# Altium PCB Control.PcbDoc
Units mm, origin at the board's own origin, x right, y up, seen from the top; angles counter-clockwise.
Board outline 131.06 x 43.05 mm, 2 copper layers (Top Layer, Bottom Layer); 28 components, 84 nets, 143 pads, 14 vias.
Unrouted connection lines stored in the file: 3.
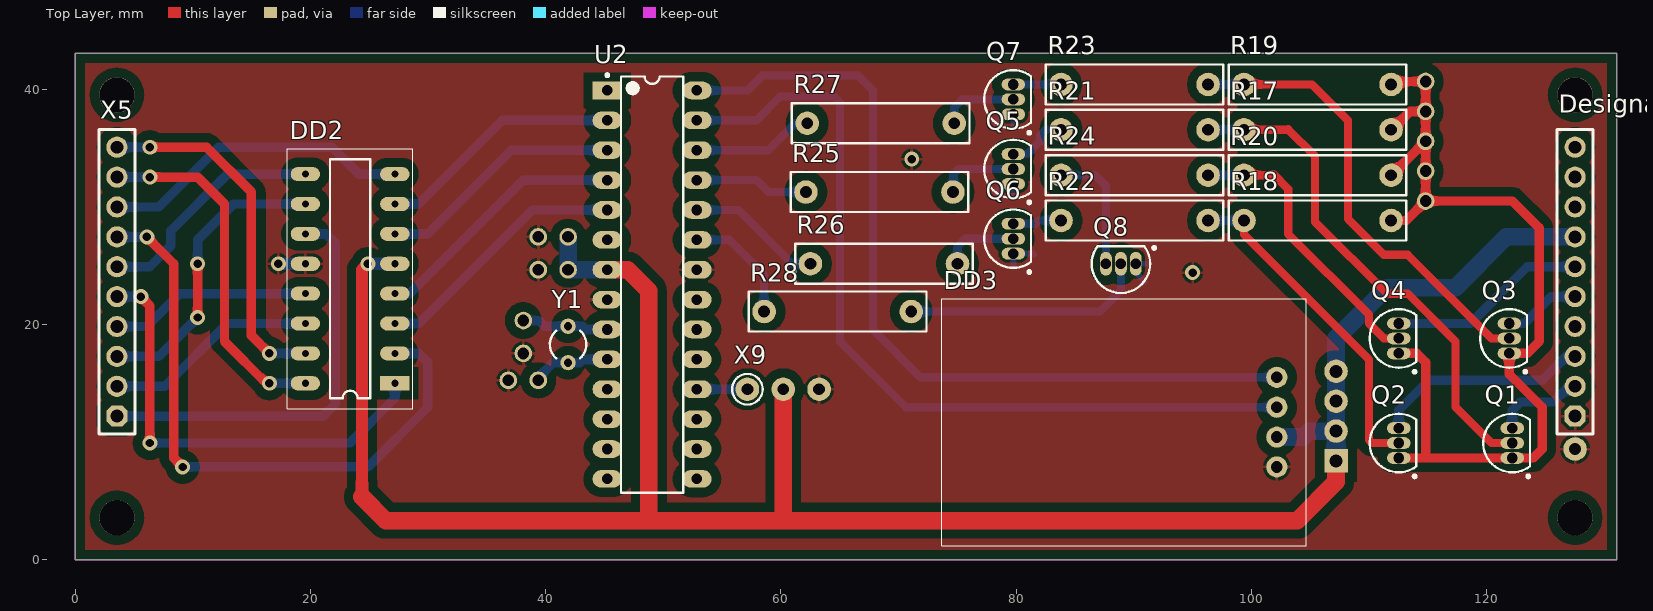
[diagram p0: Top Layer view]
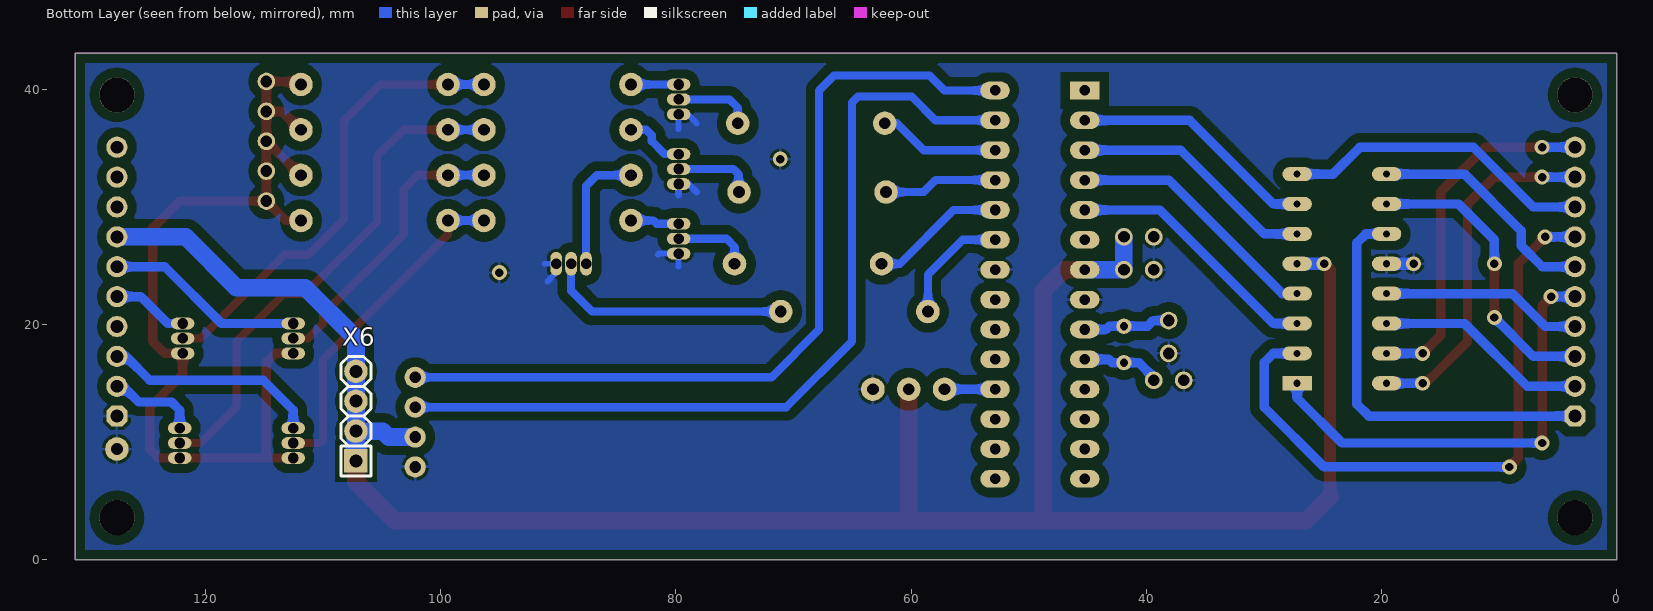
[diagram p1: Bottom Layer view, seen from below]
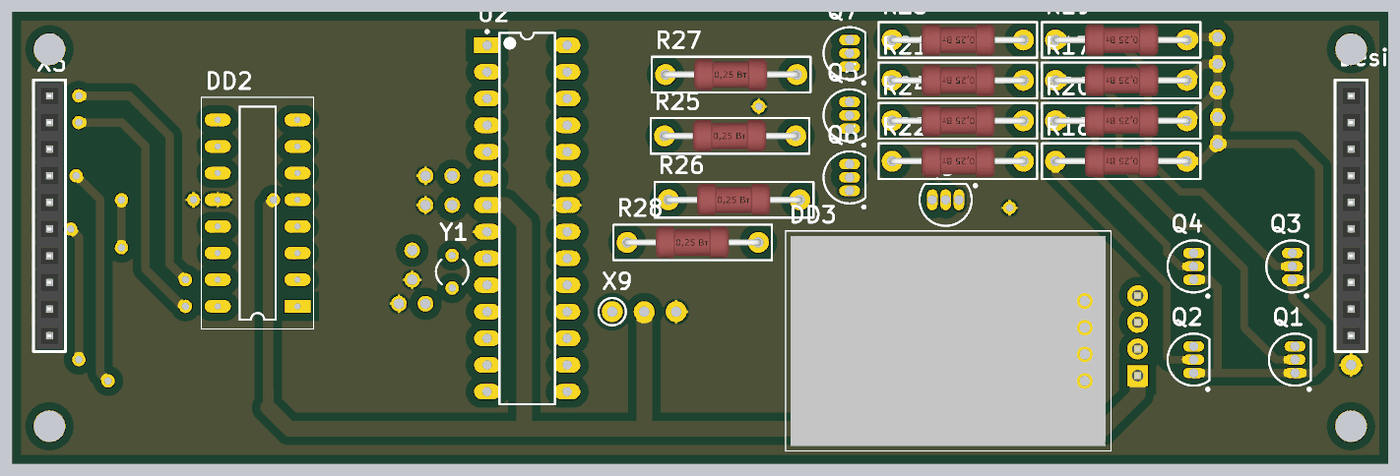
[diagram p2: 3D render of the assembled board from above, using the file's embedded part models]

## Layer stack, top to bottom
Top Solder: solder mask 0.0102, Solder Resist, Dk 3.5
Top Layer: signal copper 0.0356
Dielectric 1: dielectric 0.32, FR-4, Dk 4.8
Bottom Layer: signal copper 0.0356
Bottom Solder: solder mask 0.0102, Solder Resist, Dk 3.5

## Board outline
0,0 0,43.053 131.064,43.053 131.064,0

## Design rules (kind name [scope] priority, off if disabled: settings)
Clearance [All] p1: gap=0.8 ignorepadtopadclearanceinfootprint=FALSE except(0: Arc-Hole Track-Hole SMDPad-Hole THPad-Hole Via-Hole Fill-Hole Poly-Hole Region-Hole Text-Hole)
PolygonConnect [All] p1: connectstyle=Relief reliefconductorwidth=0.254 reliefentries=4 polygonreliefangle="90 Angle" airgapwidth=0.254
RoutingVias [All] p1: holewidth=0.711 width=1.27 viastyle="Through Hole" minholewidth=0.711 minwidth=1.27 maxholewidth=0.711 maxwidth=1.27
SolderMaskExpansion [All] p1: expansion=0.102
Width [All] p1 off: maxlimit=0.254 minlimit=0.254 preferedwidth=0.254
30 further rules are at their usual default settings.

## Classes and differential pairs
component class "Плата управления": DD2 DD3 Q1 Q2 Q3 Q5 Q6 Q7 Q8 R17 R18 R19 R20 R21 R22 R23 R24 R25 R26 R27 R28 U2 X5 X6 X9 Y1

## Components (designator, comment, footprint, x,y, rotation, side; value= is the part's Value field where it differs from the comment)
DD2 "К155ИД1" DIP16 27.178,14.986 r180 top
DD3 "DS3231" DS3231 89.154,11.684 r270 top
Designator49 "Comment" "CON: PBS-10" 127.508,23.622 r90 top
Q1 "MPSA92" TO-92A 122.174,9.906 r0 top
Q2 "MPSA92" TO-92A 112.522,9.906 r0 top
Q3 "MPSA92" TO-92A 121.92,18.796 r0 top
Q4 "MPSA92" TO-92A 112.522,18.796 r0 top
Q5 "MPSA42" TO-92A 79.756,33.198 r0 top
Q6 "MPSA42" TO-92A 79.756,27.279 r0 top
Q7 "MPSA42" TO-92A 79.756,39.116 r0 top
Q8 "MPSA42" TO-92A 88.9,25.146 r90 top
R17 "10k" MLT 105.664,36.532 r0 top
R18 "10k" MLT 105.664,28.823 r0 top
R19 "10k" MLT 105.664,40.386 r0 top
R20 "10k" MLT 105.664,32.677 r0 top
R21 "1M" MLT 90.11,36.532 r0 top
R22 "1M" MLT 90.11,28.823 r0 top
R23 "1M" MLT 90.11,40.386 r0 top
R24 "1M" MLT 90.11,32.677 r0 top
R25 "10k" MLT 68.326,31.242 r180 top
R26 "10k" MLT 68.71,25.146 r180 top
R27 "10k" MLT 68.43,37.084 r180 top
R28 "10k" MLT 64.77,21.082 r180 top
U2 "ATmega8A-PU" 28P3 49.05,23.368 r0 top
X5 "К катодам ИН" "CON: PBS-10" 3.556,23.622 r90 top
X6 "Вилка" "CON: PLS-4" 107.188,12.192 r90 bottom
X9 "DHT11" "CON: PADS 1x1mm" 57.15,14.478 r0 top
Y1 "XTAL" R38 41.91,18.288 r0 top

## Footprints (in the part's own frame and the unit in brackets; to place one, negate y for a bottom-side part, rotate by r counter-clockwise, add the part's x,y. Pads: shape width x height; smd on the part's side, far side on the other; paste and mask are expansions set on the pad)
28P3 [mm] "DIP, 28-Leads, Row Spacing 7.62mm, Pitch 2.54mm, Body 34.67x7.3mm"
  rect 2.5x1.5 hole 0.9: 1(-3.81,16.51)
  oval 2.5x1.5 hole 0.9: 2(-3.81,13.97) 3(-3.81,11.43) 4(-3.81,8.89) 5(-3.81,6.35) 6(-3.81,3.81) 7(-3.81,1.27) 8(-3.81,-1.27) 9(-3.81,-3.81) 10(-3.81,-6.35) 11(-3.81,-8.89) 12(-3.81,-11.43) 13(-3.81,-13.97) 14(-3.81,-16.51) 15(3.81,-16.51) 16(3.81,-13.97) 17(3.81,-11.43) 18(3.81,-8.89) 19(3.81,-6.35) 20(3.81,-3.81) 21(3.81,-1.27) 22(3.81,1.27) 23(3.81,3.81) 24(3.81,6.35) 25(3.81,8.89) 26(3.81,11.43) 27(3.81,13.97) 28(3.81,16.51)
  silkscreen extent -3.93,-17.7 2.65,17.93, body extent -3.6,-17.65 3.6,17.65, height 4.58
"CON: PADS 1x1mm" [mm]
  round 2 hole 1: 1(0,0)
  silkscreen extent -1.3,-1.3 1.3,1.3
"CON: PBS-10" [mm] "PBS-10"
  oct 1.8x1.8 hole 1.1: 1(-11.43,0)
  round 1.8 hole 1.1: 2(-8.89,0) 3(-6.35,0) 4(-3.81,0) 5(-1.27,0) 6(1.27,0) 7(3.81,0) 8(6.35,0) 9(8.89,0) 10(11.43,0)
  silkscreen extent -12.95,-1.52 12.95,1.52, body extent -12.7,-1.27 12.7,1.27, height 8.4
"CON: PLS-4" [mm] "PLS-40 4 pin header"
  rect 2x2 hole 1.1: 1(-3.81,0)
  round 2 hole 1.1: 2(-1.27,0) 3(1.27,0) 4(3.81,0)
  silkscreen extent -5.08,-1.27 5.08,1.27, body extent -5.08,-1.27 5.08,1.27, height 8.54
DIP16 [mm]
  rect 2.5x1.2 hole 0.6: 1(0,0)
  oval 2.5x1.2 hole 0.6: 2(0,-2.54) 3(0,-5.08) 4(0,-7.62) 5(0,-10.16) 6(0,-12.7) 7(0,-15.24) 8(0,-17.78) 9(7.6,-17.78) 10(7.6,-15.24) 11(7.6,-12.7) 12(7.6,-10.16) 13(7.6,-7.62) 14(7.6,-5.08) 15(7.6,-2.54) 16(7.6,0)
  silkscreen extent -1.52,-19.94 9.14,2.16, body extent -0.19,-19.64 7.81,1.86, height 5.3
DS3231 [mm]
  round 1.8 hole 1: 27(1.27,13) 28(-1.27,13) 29(-3.81,13) 30(3.81,13)
  silkscreen extent -10.5,-15.5 10.5,15.5, body extent -10,-15 10,15, height 5
MLT [mm]
  round 2 hole 1: 1(-6.3,0) 2(6.2,0)
  silkscreen extent -7.6,-1.7 7.5,1.7, body extent -6.55,-1.5 6.55,1.5, height 3.5
R38 [mm] "Crystal, Thru-Hole; 2 Leads; Body 3.1 x 8.2 mm (Dia.xH)"
  round 1.3 hole 0.7: 1(0,1.55) 2(0,-1.55)
  silkscreen extent -1.55,-1.19 1.55,1.17
TO-92A [mm] "TO, Flat Index; 3 In-Line, Axial Leads; Body Dia. 4.5mm; Leads 0.51 x 0.48 mm (max)"
  oval 2x1 hole 0.9: 1(0,-1.27) 2(0,0) 3(0,1.27)
  silkscreen extent -2.48,-2.95 1.5,2.48, body extent -2.48,-2.5 1.5,2.5, height 6.86

## Part data
DD2: library part K155ID1
Q1 Q2 Q3 Q4: library part 2N3906, "PNP General Purpose Amplifier", ComponentLink1Description="Manufacturer Link", ComponentLink1URL=http://www.fairchildsemi.com/, ComponentLink2Description=Datasheet, ComponentLink2URL=http://www.fairchildsemi.com/ds/2N%2F2N3906.pdf, DatasheetVersion=1997, LatestRevisionDate=15-Jan-2003, LatestRevisionNote="PCB Footprint 'BCY-W3/D4.7' replaced", PackageDescription="TO, Flat Index; 3 In-Line, Axial Leads; Body Dia. 4.5mm; Leads 0.51 x 0.48 mm (max)", PackageReference=TO-92A, PackageVersion=Sep-1998, Published=8-Jun-2000, Publisher="Altium Limited"
Q5 Q6 Q7 Q8: library part 2N3904, "NPN General Purpose Amplifier", ComponentLink1Description="Manufacturer Link", ComponentLink1URL=http://www.fairchildsemi.com/, ComponentLink2Description=Datasheet, ComponentLink2URL=http://www.fairchildsemi.com/ds/2N%2F2N3904.pdf, DatasheetVersion=1997, LatestRevisionDate=15-Jan-2003, LatestRevisionNote="PCB Footprint 'BCY-W3/D4.7' replaced", PackageDescription="TO, Flat Index; 3 In-Line, Axial Leads; Body Dia. 4.5mm; Leads 0.51 x 0.48 mm (max)", PackageReference=TO-92A, PackageVersion=Sep-1998, Published=8-Jun-2000, Publisher="Altium Limited"
R17 R18 R19 R20 R21 R22 R23 R24 R25 R26 R27 R28: library part Resistor, "MLT"
U2: "8-bit AVR Microcontroller, 8KB Flash, 512 Bytes EEPROM, 1KB SRAM, 28-pin PDIP, Industrial Grade (-40°C to 85°C)", Supplier Part Number 1=ATMEGA8A-PU-ND, ComponentLink1Description="Manufacturer Link", ComponentLink1URL=http://www.atmel.com/products/avr/default.asp?, ComponentLink2Description="ATmega8A Datasheet", ComponentLink2URL=http://www.atmel.com/dyn/resources/prod_documents/doc8159.pdf, ComponentLink3Description="ATmega8A Summary", ComponentLink3URL=http://www.atmel.com/dyn/resources/prod_documents/8159S.pdf, ComponentLink4Description="Atmel.com Home", ComponentLink4URL=http://www.atmel.com, DatasheetVersion="revC, Jul-2009", PackageDescription="28-lead (0.300\"/7.62mm Wide) Plastic Dual Inline Package (PDIP)", PackageReference=28P3, PackageVersion="revB, Sep-2001", Published=1-Apr-2010, Publisher="Altium Limited", Supplier 1=Digi-Key, Supplier 2=Farnell, Supplier 3=Mouser, Supplier Part Number 2=1748534, Supplier Part Number 3=556-ATMEGA8A-PU
X5: library part 10-Connector
X6: library part 4-Connector
X9: library part 1-Connector
Y1: "Crystal Oscillator", LatestRevisionDate=17-Jul-2002, LatestRevisionNote="Re-released for DXP Platform.", PackageDescription="Crystal, Thru-Hole; 2 Leads; Body 3.1 x 8.2 mm (Dia.xH)", PackageReference=R38, Published=8-Jun-2000, Publisher="Altium Limited"

## Free pads (board coordinates)
  round 3 hole 3: 2(3.556,3.556) 2(3.556,39.497) 2(127.508,3.556) 2(127.508,39.497)
  round 2 hole 1: 15(127.508,9.398) 26(60.198,14.478) 27(63.246,14.478)
  round 1.5 hole 1: 16(38.1,17.526) 16(39.37,15.24) 17(36.83,15.24) 17(38.1,20.32) 18(41.91,24.638) 18(41.91,27.432) 19(39.37,24.638) 19(39.37,27.432) 20(114.808,40.64) 21(114.808,38.1) 22(114.808,35.56) 24(114.808,33.02) 25(114.808,30.48)

## Via types
v1: diameter 1.27, hole 0.711, Top Layer to Bottom Layer, 14 vias

## Nets (pads, with @x,y where several pads share a name; then routed paths per layer and width w, separated by ;. In a path a pad name is that pad's centre, name@x,y a point inside that pad or via, vN(x,y) a via of type N, cw(c..) or ccw(c..) an arc to the next point about the centre after c; other vN are vias at no path point)
"12В AC": 
+5В: DD2.5 DD3.27 Designator49.7 pad.18 pad.26 U2.7 X6.1 X6.2 X6.3 X6.4 | length 189.8
  Top Layer w1: 24.384,5.334 24.384,24.638 v1(24.892,25.146)
  Top Layer w1.5: 24.384,5.334 26.416,3.302 48.768,3.302 ; U2.7 46.99,24.638 48.768,22.86 48.768,3.302 ; pad.26 60.198,3.302 ; X6.1 107.188,6.604 103.886,3.302 60.198,3.302 ; 48.768,3.302 60.198,3.302
  Bottom Layer w1: v1(24.892,25.146) DD2.5
  Bottom Layer w1.5: pad.18@41.91,27.432 41.91,24.638 U2.7 ; DD3.27 104.394,10.414 104.902,10.922 X6.2 ; X6.1 X6.2 ; Designator49.7 121.666,27.432 117.348,23.114 111.506,23.114 107.188,18.796 X6.4 X6.3 X6.2
+9В: 
+180В: pad.20 pad.21 pad.22 pad.24 pad.25 Q1.1 Q2.1 Q3.1 Q4.1 R17.2 R18.2 R19.2 R20.2 | length 80.4
  Top Layer w0.8: R18.2 113.151,28.823 pad.25 ; R20.2@111.864,32.633 114.791,35.56 pad.22 ; R17.2@111.864,36.487 113.477,38.1 pad.21 ; R19.2@111.864,40.342 112.162,40.64 pad.20 pad.21 ; Q2.1 114.808,8.636 ; Q4.1 114.046,17.526 114.808,16.764 114.808,8.636 ; 114.808,8.636 Q1.1 123.952,8.636 124.714,9.398 124.714,12.954 121.92,15.748 Q3.1 123.444,17.526 124.46,18.542 124.46,28.194 122.174,30.48 pad.25 ; pad.25 pad.24 pad.22 ; pad.22 pad.21
DHT11_PB4: U2.18 X9.1 | length 4.3
  Bottom Layer w0.8: U2.18 X9.1
DIG0: DD2.16 X5.9 | length 30.1
  Top Layer w0.8: v1(6.35,32.512) 10.414,32.512 12.7,30.226 12.7,18.542 16.256,14.986 v1(16.51,14.986)
  Bottom Layer w0.8: X5.9 v1(6.35,32.512) ; v1(16.51,14.986) DD2.16
DIG1: DD2.15 X5.10 | length 30.4
  Top Layer w0.8: v1(6.35,35.052) 11.176,35.052 14.986,31.242 14.986,19.05 v1(16.51,17.526)
  Bottom Layer w0.8: X5.10 v1(6.35,35.052) ; v1(16.51,17.526) DD2.15
DIG2: DD2.8 X5.8 | length 27.2
  Bottom Layer w0.8: X5.8 7.112,29.972 12.192,35.052 21.844,35.052 24.13,32.766 DD2.8 DD2.8@27.686,32.766
DIG3: DD2.9 X5.6 | length 20.4
  Bottom Layer w0.8: X5.6 6.35,24.892 8.064,26.607 ; 8.128,26.67 8.128,27.94 12.954,32.766 DD2.9 DD2.9@20.086,32.766
DIG4: DD2.13 X5.4 | length 17.7
  Bottom Layer w0.8: X5.4 6.096,19.812 8.89,22.606 DD2.13 DD2.13@20.086,22.606
DIG5: DD2.14 X5.2 | length 18.7
  Bottom Layer w0.8: X5.2 7.62,14.732 12.954,20.066 DD2.14 DD2.14@20.086,20.066
DIG6: DD2.11 X5.1 | length 34.5
  Bottom Layer w0.8: X5.1 21.082,12.192 22.098,13.208 22.098,26.924 21.336,27.686 DD2.11@20.594,27.686
DIG7: DD2.10 X5.3 | length 25.3
  Top Layer w0.8: v1(10.414,20.574) v1(10.414,25.146)
  Bottom Layer w0.8: X5.3 7.112,17.272 v1(10.414,20.574) ; v1(10.414,25.146) 10.414,27.178 13.462,30.226 DD2.10
DIG8: DD2.1 X5.5 | length 38.5
  Top Layer w0.8: v1(5.588,22.352) 6.35,21.59 v1(6.35,9.906)
  Bottom Layer w0.8: X5.5 v1(5.588,22.352) ; v1(6.35,9.906) 23.368,9.906 27.178,13.716 DD2.1
DIG9: DD2.2 X5.7 | length 53.2
  Top Layer w0.8: v1(6.096,27.432) 8.382,25.146 8.382,8.636 v1(9.144,7.874)
  Bottom Layer w0.8: X5.7 v1(6.096,27.432) ; v1(9.144,7.874) 24.892,7.874 29.972,12.954 29.972,16.764 29.21,17.526 DD2.2
GND: DD2.12 DD3.30 Designator49.1 pad.15 pad.16@38.1,17.526 pad.17@36.83,15.24 pad.19 pad.27 Q5.1 Q6.1 Q7.1 Q8.1 U2.8 U2.22 | length 14.5
  Bottom Layer w0.254: Q8.1 Q8.1@90.244,25.072
  Bottom Layer w0.5: 78.232,37.084 78.994,37.846 Q7.1 79.756,36.576 ; 79.756,24.892 Q6.1 81.433,26.009 81.534,25.908 ; Q8.1 91.186,25.146 ; Q8.1@90.244,25.072 90.244,24.31 90.932,23.622
  Bottom Layer w0.6: 78.232,31.242 78.918,31.928 Q5.1 79.756,30.988
  Bottom Layer w1: v1(17.272,25.146) DD2.12 DD2.12@20.086,25.146
  other v1: 94.996,24.384 71.12,34.036
IN1: Designator49.2 Q1.3 | length 7.7
  Bottom Layer w0.8: Q1.3 122.174,12.7 122.865,13.391 125.659,13.391 127,14.732 Designator49.2
IN2: Designator49.3 Q2.3 | length 18.4
  Bottom Layer w0.8: Q2.3 112.522,12.7 115.062,15.24 124.714,15.24 126.746,17.272 Designator49.3
IN3: Designator49.5 Q3.3 | length 6.5
  Bottom Layer w0.8: Q3.3 123.19,20.066 125.476,22.352 Designator49.5
IN4: Designator49.6 Q4.3 | length 17
  Bottom Layer w0.8: Q4.3 118.618,20.066 123.444,24.892 Designator49.6
L1: 
L2: 
L3: 
L4: 
L5: 
L6: 
L7: 
L8: 
L9: 
L10: 
NetC5_1: 
NetD1_1: 
NetDD1_1: 
NetDD1_3: 
NetDD1_8: 
NetDD2_3: DD2.3 U2.5 | length 22.1
  Bottom Layer w0.8: DD2.3 29.21,20.066 38.862,29.718 U2.5
NetDD2_4: DD2.4 U2.4 | length 22.1
  Bottom Layer w0.8: DD2.4 28.448,22.606 38.1,32.258 U2.4
NetDD2_6: DD2.6 U2.3 | length 21
  Bottom Layer w0.8: DD2.6 29.972,27.686 37.084,34.798 U2.3
NetDD2_7: DD2.7 U2.2 | length 21
  Bottom Layer w0.8: DD2.7 29.21,30.226 36.322,37.338 U2.2
NetHG1_11: 
NetHG2_11: 
NetHG3_11: 
NetHG4_11: 
NetHG5_2: 
NetQ1_2: Q1.2 R17.1 R21.2 | length 43.5
  Top Layer w0.7: R17.1 103.08,36.532 103.124,36.576 105.41,34.29 105.41,28.702 111.506,22.606 113.284,22.606 117.348,18.542 117.348,12.954 120.396,9.906 Q1.2
  Bottom Layer w0.7: R21.2 R17.1
NetQ2_2: Q2.2 R18.1 R22.2 | length 28.8
  Top Layer w0.7: R18.1 99.364,27.636 109.982,17.018 109.982,10.16 110.236,9.906 Q2.2
  Bottom Layer w0.7: R22.2 R18.1
NetQ3_2: Q3.2 R19.1 R23.2 | length 39.5
  Top Layer w0.7: R19.1 105.156,40.386 108.204,37.338 108.204,28.956 111.252,25.908 113.284,25.908 120.396,18.796 Q3.2
  Bottom Layer w0.7: R23.2 R19.1
NetQ4_2: Q4.2 R20.1 R24.2 | length 24.7
  Top Layer w0.7: R20.1 101.765,32.677 101.854,32.766 103.124,31.496 103.124,27.686 109.982,20.828 109.982,20.066 111.252,18.796 Q4.2
  Bottom Layer w0.7: R24.2 R20.1
NetQ5_2: Q5.2 R25.1 | length 6.8
  Bottom Layer w0.7: R25.1 74.676,31.292 74.676,32.766 75.108,33.198 Q5.2
NetQ5_3: Q5.3 R21.1 | length 5.2
  Bottom Layer w0.7: Q5.3 80.95,34.468 82.042,35.56 82.042,36.068 82.506,36.532 R21.1
NetQ6_2: Q6.2 R26.1 | length 6.5
  Bottom Layer w0.7: R26.1 75.01,26.59 75.699,27.279 Q6.2
NetQ6_3: Q6.3 R22.1 | length 4.2
  Bottom Layer w0.7: Q6.3 81.635,28.549 81.909,28.823 R22.1
NetQ7_2: Q7.2 R27.1 | length 6.6
  Bottom Layer w0.7: R27.1 74.73,38.408 75.438,39.116 Q7.2
NetQ7_3: Q7.3 R23.1 | length 4.1
  Bottom Layer w0.7: Q7.3 R23.1
NetQ8_2: Q8.2 R28.1 | length 20.9
  Bottom Layer w0.7: R28.1 87.122,21.082 88.9,22.86 Q8.2
NetQ8_3: Q8.3 R24.1 | length 10.8
  Bottom Layer w0.7: R24.1 86.703,32.677 87.63,31.75 Q8.3
NetR1_1: 
NetR1_2: 
NetR2_1: 
NetR2_2: 
NetR3_1: 
NetR3_2: 
NetR4_2: 
NetR5_2: 
NetR6_2: 
NetR7_2: 
NetR8_2: 
NetR9_2: 
NetR10_2: 
NetR11_2: 
NetR13_2: 
PC0: R28.2 U2.23 | length 10.1
  Bottom Layer w0.7: U2.23 55.626,27.178 58.57,24.234 R28.2
PC1: R26.2 U2.24 | length 11.5
  Bottom Layer w0.7: U2.24 56.388,29.718 60.96,25.146 R26.2
PC2: R25.2 U2.25 | length 9.7
  Bottom Layer w0.7: U2.25 57.912,32.258 58.928,31.242 R25.2
PC3: R27.2 U2.26 | length 10.3
  Bottom Layer w0.7: U2.26 58.928,34.798 61.214,37.084 R27.2
RGB1: Designator49.10 U2.15
RGB2: Designator49.9 U2.16
RGB3: Designator49.8 U2.17
RTC_SCL: DD3.29 U2.28 | length 72.3
  Bottom Layer w0.7: U2.28 57.15,39.878 58.42,41.148 66.548,41.148 67.818,39.878 67.818,19.558 71.882,15.494 DD3.29
RTC_SDA: DD3.28 U2.27 | length 73
  Bottom Layer w0.7: U2.27 57.912,37.338 59.944,39.37 64.516,39.37 65.024,38.862 65.024,18.542 70.612,12.954 DD3.28
VCC: 
XTAL1: pad.17@38.1,20.32 U2.9 Y1.1 | length 7.2
  Bottom Layer w0.8: pad.17@38.354,20.32 39.422,20.32 39.904,19.838 Y1.1 43.154,19.838 43.434,19.558 U2.9
XTAL2: pad.16@39.37,15.24 U2.10 Y1.2 | length 6.8
  Bottom Layer w0.8: pad.16@39.37,15.24 39.37,15.494 40.614,16.738 Y1.2 42.9,16.738 43.18,17.018 U2.10
ИНС-1: Designator49.4
pads on no net: U2.1 U2.6 U2.11 U2.12 U2.13 U2.14 U2.19 U2.20 U2.21

## Polygon pours and split planes (outlines as drawn)
GND on Bottom Layer "Bottom layer" (solid, remove dead copper, pour order 0): 0,43.053 131.064,43.053 131.064,0 0,0
GND on Top Layer "Top layer" (solid, remove dead copper, pour order 2): 0,43.053 131.064,43.053 131.064,0 0,0

## Keep-outs
Keep-Out Layer:
  the board outline again, w0.1

## Other copper
Top Layer:
  pour cut-out: 98.806,39.37 107.442,39.37 107.442,28.448 107.188,28.702 106.172,28.702 106.172,34.036 103.886,36.322 103.886,36.576 102.87,36.576 102.34,37.106 99.292,37.106 98.806,37.592
  pour cut-out: 98.806,35.56 104.648,35.56 104.648,31.242 102.328,31.242 99.534,34.036 98.806,34.036
  pour cut-out: 98.806,31.75 102.108,31.75 109.474,24.384 109.474,19.812 107.442,19.812 100.33,26.924 100.33,28.702 98.806,30.226